# EAGLE board mini (EAGLE 6.2)
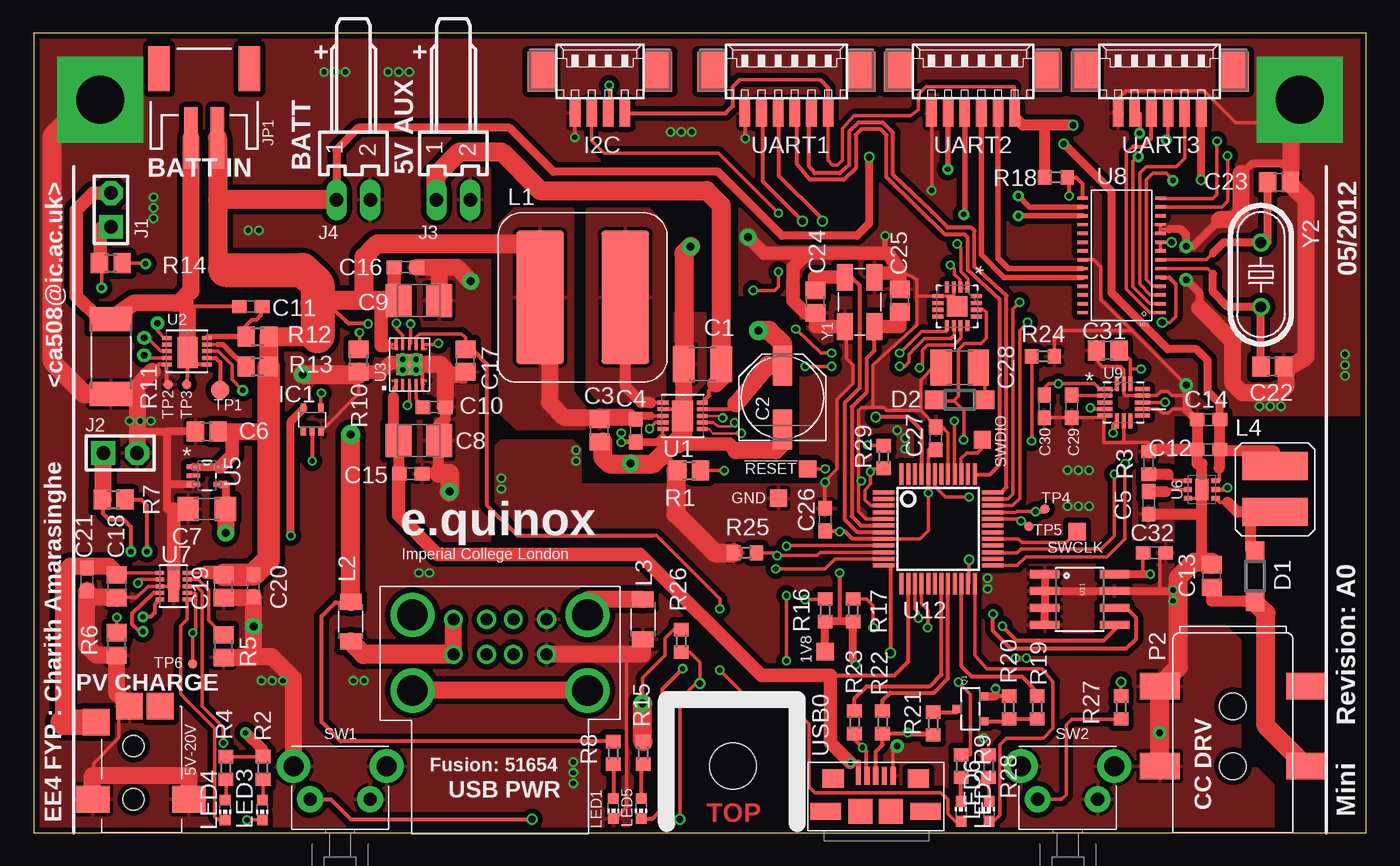
[diagram p0: board, top side]
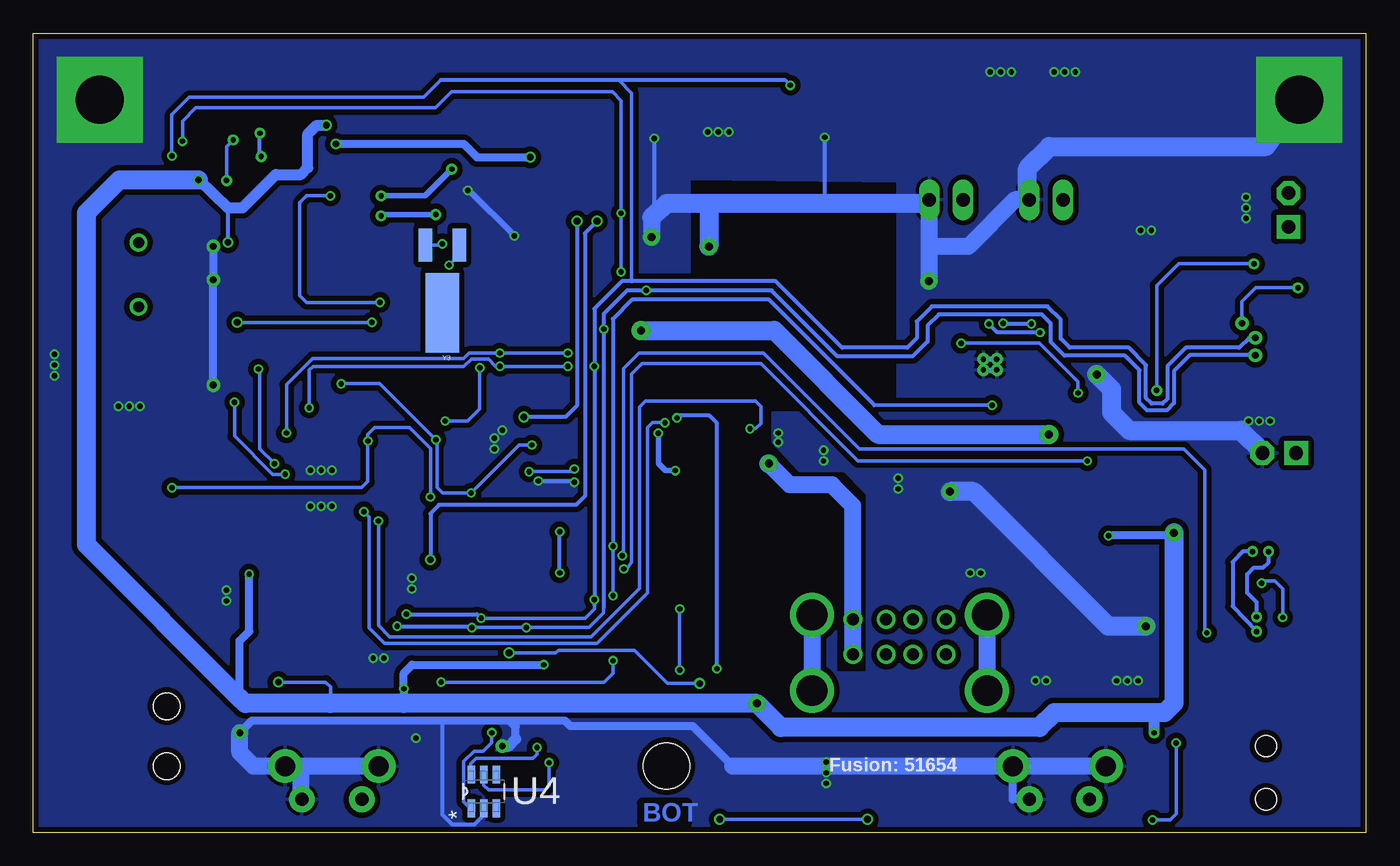
[diagram p1: board, bottom side, seen from below]

Size 100 x 60 mm. Coordinates in mm from the lower left corner, seen from the top.
Outline: 0,0 100,0 100,60 0,60 0,0
Copper layers (1*16): Top 0.035mm / dielectric 1.5mm / Bottom 0.035mm
Design rules: minimum track width 6mil, minimum drill 12mil, track to track 6mil, track to pad 6mil, pad to pad 6mil, via to via 6mil, smd to smd 0mil, copper to edge 10mil, drill to drill 10mil, minimum pad ring 10mil, minimum via ring 6mil, stop-mask expansion 2mil, vias tented up to drill 100mil, thermal gap 10mil
Holes 3.5 mm at 52.5,5

## Footprints (pad centres in the part's own frame; a part is rotated, then mirrored left to right if it is on the bottom)
TP13SQ = smd 1.3 x 1.3: TP 0,0
C1210 = smd 1.6 x 2.7: 1 -1.4,0; 2 1.4,0
PANASONIC_D = smd 3 x 1.4: + 2.4,0; - -2.4,0
C0805 = smd 1.3 x 1.5: 1 -0.85,0; 2 0.85,0
C0603 = smd 1.1 x 1: 1 -0.85,0; 2 0.85,0
C1206 = smd 1.6 x 1.8: 1 -1.4,0; 2 1.4,0
B/3528-21R = smd 1.95 x 2.5: + 1.525,0; - -1.525,0
C3225 = smd 1.6 x 2.7: 1 -1.4,0; 2 1.4,0
SOD123 = smd 1.4 x 1.4: A 1.9,0; C -1.9,0
53261-04 = smd 0.8 x 2: 1 1.875,-2.5; 2 0.625,-2.5; 3 -0.625,-2.5; 4 -1.875,-2.5 | smd 2.1 x 3: S1 4.375,0.625; S2 -4.375,0.625
SC70-5 = smd 0.4 x 0.7: 1 -0.65,-0.85; 2 0,-0.85; 3 0.65,-0.85; 4 0.65,0.85; 5 -0.65,0.85
SIP-100-02-40 = drill 1.016 pad 1.778 square: 1 -1.27,0 | drill 1.016 pad 1.778 octagon: 2 1.27,0
7395-02 = drill 1.016 long: 1 1.27,0; 2 -1.27,0
JST-2-SMD = smd 1 x 4.6: 1 -1,-3.7; 2 1,-3.7 | smd 1.6 x 3.4: NC1 -3.4,1.5; NC2 3.4,1.5
SDR1006 = smd 10.008 x 3.607: P$1 0,3.2; P$2 0,-3.2
L3216C = smd 1.2 x 1.6: 1 -1.5,0; 2 1.5,0
VLCF-SERIES = smd 4.9 x 2.1: 1 0,-1.7; 2 0,1.75
CHIP-LED0603 = smd 0.8 x 0.8: A 0,-0.75; C 0,0.75
FC68145S = smd 2 x 2: 1 0.3,-3; 2 -2,-3; 3 2.8,-1.8 | smd 2.5 x 2: 4A -4.15,4; 4B 3.05,4 | hole 1.6: 0,0; 0,4
FC6814XS = smd 3 x 2: 1A -5.5,-4.5; 1B -5.5,1.5; 2 5.5,1.5; 3 5.5,-4.5 | hole 2: 0,0; 0,-4.5
SOT23-R = smd 0.6 x 0.7: 1 -0.95,-1; 2 0.95,-1; 3 0,1
R0805 = smd 1.3 x 1.5: 1 -0.85,0; 2 0.85,0
R0603 = smd 1 x 1.1: 1 -0.85,0; 2 0.85,0
R2512 = smd 1.8 x 3.2: 1 -2.8,0; 2 2.8,0
B3F-315X = drill 1 pad 1.93: 1 -2.25,0; 2 2.25,0 | drill 1.5 pad 2.54: 3 -3.5,2.5; 4 3.5,2.5
TP14R = smd 1.4 x 1.4: TP 0,0
TP07R = smd 0.7 x 0.7: TP 0,0
SON50P300X300X100-11N = smd 0.813 x 0.305: 1 -1.473,0.991; 2 -1.473,0.508; 3 -1.473,0; 4 -1.473,-0.508; 5 -1.473,-0.991; 6 1.473,-0.991; 7 1.473,-0.508; 8 1.473,0; 9 1.473,0.508; 10 1.473,0.991 | smd 1.549 x 2.311: 11 0,0
DFN300X300X80-11N = smd 0.711 x 0.305: 1 -1.499,0.991; 2 -1.499,0.508; 3 -1.499,0; 4 -1.499,-0.508; 5 -1.499,-0.991; 6 1.499,-0.991; 7 1.499,-0.508; 8 1.499,0; 9 1.499,0.508; 10 1.499,0.991 | smd 1.499 x 2.311: 11 0.051,-0.102
INTERSIL_DFN_3X3 = smd 0.23 x 0.8: P1 -1,-1.5; P2 -0.5,-1.5; P3 0,-1.5; P4 0.5,-1.5; P5 1,-1.5; P6 1,1.5; P7 0.5,1.5; P8 0,1.5; P9 -0.5,1.5; P10 -1,1.5 | drill 0.4 pad 0.813: P$1 0.5,0.4; P$2 -0.5,0.4; P$3 -0.5,-0.4; P$4 0.5,-0.4 | smd 2 x 1.6: PAD 0,0
SOT95P275X110-6N = smd 1.321 x 0.559: 1 -1.27,0.94; 2 -1.27,0; 3 -1.27,-0.94; 4 1.27,-0.94; 5 1.27,0; 6 1.27,0.94
SOT65P210X110-5N = smd 1.016 x 0.356: 1 -1.016,0.66; 2 -1.016,0; 3 -1.016,-0.66; 4 1.016,-0.66; 5 1.016,0.66
SON65P210X210X80-7N = smd 0.61 x 0.356: 1 -1.041,0.66; 2 -1.041,0; 3 -1.041,-0.66; 4 1.041,-0.66; 5 1.041,0; 6 1.041,0.66 | smd 0.991 x 1.6: 7 0,0
SON50P200X300X80-11N = smd 0.66 x 0.305: 1 -1.016,0.991; 2 -1.016,0.508; 3 -1.016,0; 4 -1.016,-0.508; 5 -1.016,-0.991; 6 1.016,-0.991; 7 1.016,-0.508; 8 1.016,0; 9 1.016,0.508; 10 1.016,0.991 | smd 0.838 x 2.388: 11 0,0
QFN50P300X300X100-17N = smd 0.813 x 0.305: 1 -1.448,0.762; 2 -1.448,0.254; 3 -1.448,-0.254; 4 -1.448,-0.762; 9 1.448,-0.762; 10 1.448,-0.254; 11 1.448,0.254; 12 1.448,0.762 | smd 0.305 x 0.813: 5 -0.762,-1.448; 6 -0.254,-1.448; 7 0.254,-1.448; 8 0.762,-1.448; 13 0.762,1.448; 14 0.254,1.448; 15 -0.254,1.448; 16 -0.762,1.448 | smd 1.549 x 1.549: 17 0,0
QFN50P300X300X100-16N = smd 1.118 x 0.305: 1 -1.397,0.991; 2 -1.397,0.508; 3 -1.397,0; 4 -1.397,-0.508; 5 -1.397,-0.991; 9 1.397,-0.991; 10 1.397,-0.508; 11 1.397,0; 12 1.397,0.508; 13 1.397,0.991 | smd 0.305 x 1.118: 6 -0.508,-1.397; 7 0,-1.397; 8 0.508,-1.397; 14 0.508,1.397; 15 0,1.397; 16 -0.508,1.397
TSSOP28 = smd 0.8 x 0.25: 1 -2.921,4.623; 2 -2.921,3.962; 3 -2.921,3.302; 4 -2.921,2.642; 5 -2.921,1.981; 6 -2.921,1.321; 7 -2.921,0.66; 8 -2.927,0; 9 -2.921,-0.66; 10 -2.921,-1.321; 11 -2.921,-1.981; 12 -2.921,-2.642; 13 -2.921,-3.302; 14 -2.921,-3.962; 15 2.921,-3.962; 16 2.921,-3.302; 17 2.921,-2.642; 18 2.921,-1.981; 19 2.921,-1.321; 20 2.921,-0.66; 21 2.927,0; 22 2.921,0.66; 23 2.921,1.321; 24 2.921,1.981; 25 2.921,2.642; 26 2.921,3.302; 27 2.921,3.962; 28 2.921,4.623
SO08 = smd 0.61 x 2.21: 1 -1.905,-2.616; 2 -0.635,-2.616; 3 0.635,-2.616; 4 1.905,-2.616; 5 1.905,2.616; 6 0.635,2.616; 7 -0.635,2.616; 8 -1.905,2.616
LQFP48 = smd 0.3 x 1.6: 1 -2.75,-4.1; 2 -2.25,-4.1; 3 -1.75,-4.1; 4 -1.25,-4.1; 5 -0.75,-4.1; 6 -0.25,-4.1; 7 0.25,-4.1; 8 0.75,-4.1; 9 1.25,-4.1; 10 1.75,-4.1; 11 2.25,-4.1; 12 2.75,-4.1; 25 2.75,4.1; 26 2.25,4.1; 27 1.75,4.1; 28 1.25,4.1; 29 0.75,4.1; 30 0.25,4.1; 31 -0.25,4.1; 32 -0.75,4.1; 33 -1.25,4.1; 34 -1.75,4.1; 35 -2.25,4.1; 36 -2.75,4.1 | smd 1.6 x 0.3: 13 4.1,-2.75; 14 4.1,-2.25; 15 4.1,-1.75; 16 4.1,-1.25; 17 4.1,-0.75; 18 4.1,-0.25; 19 4.1,0.25; 20 4.1,0.75; 21 4.1,1.25; 22 4.1,1.75; 23 4.1,2.25; 24 4.1,2.75; 37 -4.1,2.75; 38 -4.1,2.25; 39 -4.1,1.75; 40 -4.1,1.25; 41 -4.1,0.75; 42 -4.1,0.25; 43 -4.1,-0.25; 44 -4.1,-0.75; 45 -4.1,-1.25; 46 -4.1,-1.75; 47 -4.1,-2.25; 48 -4.1,-2.75
53261-06 = smd 0.8 x 2: 1 3.125,-2.5; 2 1.875,-2.5; 3 0.625,-2.5; 4 -0.625,-2.5; 5 -1.875,-2.5; 6 -3.125,-2.5 | smd 2.1 x 3: S1 5.625,0.625; S2 -5.625,0.625
TE-MICROUSB-AB = smd 1.8 x 1.9: 1 -1.15,0; 2 1.15,0 | smd 2.3 x 1.3: 3 -3.75,0; 4 3.75,0 | smd 1.6 x 1.4: 10 -3.2,2.45; 11 3.2,2.45 | smd 0.4 x 1.35: P1 -1.3,2.675; P2 -0.65,2.675; P3 0,2.675; P4 0.65,2.675; P5 1.3,2.675
MC32594 = drill 2.3: P$1 -6.57,0.35; P$2 6.57,0.35; P$3 -6.57,-5.33; P$4 6.57,-5.33 | drill 0.9: USB1-1 -3.5,0; USB1-2 -1,0; USB1-3 1,0; USB1-4 3.5,0; USB2-1 -3.5,-2.62; USB2-2 -1,-2.62; USB2-3 1,-2.62; USB2-4 3.5,-2.62
TXC-7B = smd 2 x 1.2: 1 -1.85,-1.1; 2 1.85,-1.1; 3 1.85,1.1; 4 -1.85,1.1
HC49U-V = drill 0.813: 1 -2.413,0; 2 2.413,0
CRYSTAL-32KHZ-SMD = smd 2.5 x 6: SHEILD 0,5.08 | smd 1 x 2.5: X1 -1.27,0; X2 1.27,0

## Placement (x,y rotation side)
1V8  TPSTP13SQ  [TP13SQ]  59.4,13.6 0 top
!RESET!  TPSTP13SQ  [TP13SQ]  58.1,27.3 0 top
C1  22uF  [C1210]  50.2,35.18 180 top
C2  150uF  [PANASONIC_D]  56.2,32.68 90 top
C3  10uF  [C0805]  42.45,30.18 90 top
C4  0.1uF  [C0603]  45.2,30.18 270 top
C5  220nF  [C0603]  83.66,24.76 270 top
C6  100nF  [C0805]  13,30.1 180 top
C7  1uF  [C1206]  13,24.3 180 top
C8  10uF  [B/3528-21R]  28.9,29.44 180 top
C9  10uF  [B/3528-21R]  28.9,39.94 180 top
C10  1n  [C0603]  30.05,31.94 0 top
C11  10n  [C0603]  16.3,39.49 180 top
C12  1uF  [C0603]  88.16,28.76 180 top
C13  1uF  [C0805]  88.41,19.26 90 top
C14  0.1uF  [C0603]  88.16,31.01 180 top
C15  100n  [C0603]  28.3,26.94 0 top
C16  100n  [C0603]  27.9,42.44 0 top
C17  1uF  [C0805]  32.4,35.44 270 top
C18  1uF  [C0805]  6.25,18.5 270 top
C19  1uF  [C0805]  14.25,18.5 270 top
C20  100n  [C0603]  16.5,18.52 270 top
C21  100n  [C0603]  4,19 270 top
C22  [C0805]  92.96,34.98 180 top
C23  [C0805]  93.46,48.82 180 top
C24  [C0805]  58.66,39.86 90 top
C25  [C0805]  65,39.94 270 top
C26  100n  [C0603]  59.4,23.5 90 top
C27  100n  [C0603]  67.7,29.6 90 top
C28  0.015F  [C3225]  69.5,34.9 180 top
C29  0.1uF  [C0603]  77.9,32 270 top
C30  0.1uF  [C0603]  75.85,32 270 top
C31  4.7uF  [C0805]  80.6,36.2 180 top
C32  0.1uF  [C0603]  84.1,21 0 top
D1  MBR0540T1  [SOD123]  91.66,19.26 90 top
D2  [SOD123]  69.5,32.5 180 top
GND  TPSTP13SQ  [TP13SQ]  55.9,25.1 0 top
I2C  53261-04  [53261-04]  42.5,56.5 0 top
IC1  74LVC1G06DCK  [SC70-5]  20.9,31 0 top
J1  F-1X02-SIP-100-40  [SIP-100-02-40]  5.8,46.74 90 top
J2  F-1X02-SIP-100-40  [SIP-100-02-40]  6.5,28.5 0 top
J3  22-05-7028-02  [7395-02]  31.5,47.5 180 top
J4  22-05-7028-02  [7395-02]  24,47.5 180 top
JP1  [JST-2-SMD]  12.8,55.84 0 top
L1  2.2uH  [SDR1006]  41.2,40.18 90 top
L2  30ohm  [L3216C]  23.8,15.84 90 top
L3  30ohm  [L3216C]  45.72,16 270 top
L4  22uH  [VLCF-SERIES]  93.16,25.76 0 top
LED1  USB_ON  [CHIP-LED0603]  43.5,1.8 180 top
LED2  USB_CHG_GD  [CHIP-LED0603]  69.6,1.6 0 top
LED3  CHG  [CHIP-LED0603]  17.16,1.7 180 top
LED4  PG  [CHIP-LED0603]  14.38,1.7 180 top
LED5  USB_FAULT  [CHIP-LED0603]  45.6,1.8 180 top
LED6  USRLED  [CHIP-LED0603]  71.7,1.6 0 top
P1  CLIFF_DCJACK1.3MM  [FC68145S]  7.5,6.5 180 top
P2  CLIFF_DCJACK2.1-2.5MM  [FC6814XS]  90,9.5 0 top
Q1  MMBT2907  [SOT23-R]  70.3,9.3 90 top
R1  28.7k  [R0805]  49.2,27.18 0 top
R2  100  [R0603]  17.22,4.86 90 top
R3  2.7  [R0603]  83.66,27.76 270 top
R4  100  [R0603]  14.44,4.86 90 top
R5  RDPM  [R0805]  14.25,14 90 top
R6  800  [R0805]  6.25,14.16 90 top
R7  RVTSB  [R0805]  6,25 0 top
R8  1K  [R0603]  43.5,6 90 top
R9  200  [R0603]  69.6,5 270 top
R10  80k  [R0805]  24.4,35.44 90 top
R11  0.015  [R2512]  5.8,35.74 270 top
R12  150  [R0805]  16.8,37.24 0 top
R13  1K  [R0805]  16.8,34.99 0 top
R14  10K  [R0805]  5.8,42.74 0 top
R15  100  [R0603]  45.75,6 90 top
R16  2.7k  [R0603]  59.4,16.7 270 top
R17  2.7k  [R0603]  61.5,16.7 270 top
R18  1.5k  [R0603]  76.72,49.18 180 top
R19  2K  [R0603]  75.3,9.4 270 top
R20  10K  [R0603]  73.2,9.4 90 top
R21  1.5K  [R0603]  67.5,8.2 90 top
R22  33  [R0603]  63.7,8.3 90 top
R23  33  [R0603]  61.6,8.3 90 top
R24  2.7k  [R0603]  75.75,35.75 180 top
R25  10K  [R0603]  53.4,21 0 top
R26  2.7k  [R0603]  48.6,14.4 90 top
R27  2.7k  [R0603]  81.6,9.4 90 top
R28  500  [R0603]  71.65,5 270 top
R29  2.7k  [R0603]  63.8,28.2 90 top
SW1  B3F-3152  [B3F-315X]  23,2.5 0 top
SW2  B3F-3152  [B3F-315X]  77.6,2.5 0 top
SWCLK  TPSTP13SQ  [TP13SQ]  78.3,22.6 0 top
SWDIO  TPSTP13SQ  [TP13SQ]  71.2,29.5 0 top
TP1  TPTP14R  [TP14R]  14,33.24 0 top
TP2  TPTP07R  [TP07R]  10.1,33.64 0 top
TP3  TPTP07R  [TP07R]  11.5,33.64 270 top
TP4  TPTP07R  [TP07R]  75.9,24.3 0 top
TP5  TPTP07R  [TP07R]  74.7,23 0 top
TP6  TPTP07R  [TP07R]  11.92,12.66 0 top
U1  TPS2500  [SON50P300X300X100-11N]  48.7,31.28 0 top
U2  DS2786G+  [DFN300X300X80-11N]  11.5,36.14 0 top
U3  ISL9203  [INTERSIL_DFN_3X3]  28.2,35.14 0 top
U4  IP4220CZ6  [SOT95P275X110-6N]  66.2,3.1 90 bottom
U5  NCP4588DSQ25T1G  [SOT65P210X110-5N]  13,26.8 0 top
U6  TPS61160ADRVT  [SON65P210X210X80-7N]  87.66,25.76 0 top
U7  BQ24210DQCT  [SON50P200X300X80-11N]  10.5,18.5 0 top
U8  M41T62Q6F  [QFN50P300X300X100-17N]  69.3,39.5 270 top
U9  MMA8453Q  [QFN50P300X300X100-16N]  81.8,32.3 0 top
U10  SC16IS752  [TSSOP28]  81.64,43.66 180 top
U11  EEPROM-I2CSMD  [SO08]  78.5,17.5 270 top
U12  LPC11U24FBD48/401  [LQFP48]  67.88,22.8 270 top
UART1  53261-06  [53261-06]  56.5,56.5 0 top
UART2  53261-06  [53261-06]  70.5,56.5 0 top
UART3  53261-06  [53261-06]  84.5,56.5 0 top
USB0  TE1981584-1  [TE-MICROUSB-AB]  63.2,1.6 0 top
USB2  MULTICOMP-MC32594  [MC32594]  35,16 0 top
Y1  TXC-7B  [TXC-7B]  62,39.84 90 top
Y2  1.8432M  [HC49U-V]  92.1,41.88 270 top
Y3  32.768kHz  [CRYSTAL-32KHZ-SMD]  69.3,44.1 180 bottom

## Library data of the parts
1V8 !RESET! GND SWCLK SWDIO TP1-TP6 = testpad
C1 = resistor; FARNELL: 1907362
C2 = resistor; FARNELL: 1850096
C3 = resistor; FARNELL: 1833812
C4-C7 C10 C11 C14-C17 C20-C32 R2 R4-R10 R12-R29 = resistor
C8 C9 = resistor; FARNELL: CA06845
C12 = resistor; FARNELL: 1828798
C13 C18 = resistor; FARNELL: 1735541
C19 = resistor; FARNELL: 1833845
D1 = diode; FARNELL: 9556923
D2 = diode
I2C = con-molex; OC_FARNELL: 1125374; OC_NEWARK: unknown
IC1 = 74xx-little-de
J1 J2 = con-headers-jp
J3 J4 = con-molex; OC_FARNELL: 9731601; OC_NEWARK: unknown
JP1 = SparkFun-Connectors
L1 = farnellparts; FARNELL: 1828074
L2 L3 = resistor; FARNELL: FT01179
L4 = minibox-parts; FARNELL: 1670099
LED1-LED6 = led
P1 P2 SW1 SW2 U12 Y1 = minibox-parts
Q1 = microbuilder
R1 = resistor; FARNELL: 1160233
R3 = resistor; FARNELL: 1717778
R11 = resistor; FARNELL: 1107396
U1 = minibox-parts; MPN: TPS2500DRCT; OC_FARNELL: 1774589; OC_NEWARK: 29R0268; PACKAGE: SON-10; SUPPLIER: Texas Instruments
U2 = minibox-parts; DESCRIPTION: Stand-Alone OCV-Based Fuel Gauge; MPN: DS2786G+; OC_FARNELL: -; OC_NEWARK: 50M0907; PACKAGE: DFN-10; SUPPLIER: Maxim
U3 = minibox-parts; FARNELL: 1361031
U4 = minibox-parts; MPN: IP4220CZ6; OC_FARNELL: 1506629; OC_NEWARK: 61M6815; PACKAGE: SSOT-6; SUPPLIER: NXP
U5 = minibox-parts; MPN: NCP4588DSQ25T1G; OC_FARNELL: 1885132; OC_NEWARK: 41T0737; PACKAGE: SC70-5; SUPPLIER: ON SEMICONDUCTOR
U6 = EE4_EQNXMPPT_PARTS; MPN: TPS61160ADRVT; OC_FARNELL: 1735594; OC_NEWARK: 1735594; PACKAGE: SON-6; SUPPLIER: Texas Instruments
U7 = minibox-parts; MPN: BQ24210DQCT; OC_FARNELL: 1903633; OC_NEWARK: 56T0491; PACKAGE: SON-10; SUPPLIER: TEXAS INSTRUMENTS
U8 = minibox-parts; MPN: M41T62Q6F; OC_FARNELL: 1224441; OC_NEWARK: 56P9316; PACKAGE: QFN-16; SUPPLIER: STMICROELECTRONICS
U9 U10 = farnellparts
U11 = SparkFun-DigitalIC
UART1-UART3 = con-molex; OC_FARNELL: 1125375; OC_NEWARK: unknown
USB0 USB2 = connectors-bbng
Y2 = SparkFun-FreqCtrl; FARNELL: 1611755
Y3 = SparkFun-FreqCtrl

## Nets
1.8V: 1V8.TP C7.1 C26.1 C27.1 C30.1 C32.1 D2.A I2C.1 IC1.5 Q1.2 R2.2 R4.2 R15.2 R16.2 R17.2 R18.2 R20.2 R26.2 R27.2 R29.2 U5.4 U8.14 U9.1 U10.8 U10.9 U11.8 U12.8 U12.44 UART1.1 UART2.1 UART3.1
!CHRG_ST!: R9.1 U3.P3 U12.9
!EN_PVCHG!: R25.2 TP6.TP U7.7 U12.10
!EXT_UART_RST!: U10.5 U12.34
!USB_CHG_EN!: IC1.2 U12.11
+5V: C8.+ C15.1 U3.P1 U4.5 U12.14 USB0.P1
+5V/1: C2.+ L2.2 R8.2 U1.9
+5V/2: C1.1 J3.1 U1.10
+12V: C13.1 D1.C P2.3
+18V: C18.1 C21.1 P1.3 U7.1
AXM_INT: U9.11 U12.27
AXM_ON: C31.1 U9.14 U12.25
CHRG_EN: IC1.4 U3.P6
EN_5V: TP5.TP U1.4 U12.32
EN_USB: TP4.TP U1.7 U12.33
EXT_UART_IRQ: R18.1 U10.15 U12.35
FG_AIN0: J1.1 R14.1 U2.1
FG_VOUT: R14.2 U2.8
GND: C1.2 C2.- C3.1 C4.2 C5.2 C6.2 C7.2 C8.- C9.- C10.2 C12.2 C13.2 C14.2 C15.2 C16.2 C17.2 C18.2 C19.2 C20.2 C21.2 C22.1 C23.1 C24.1 C25.1 C26.2 C27.2 C28.2 C29.2 C30.2 C31.2 C32.2 GND.TP I2C.4 IC1.3 J2.2 J3.2 J4.2 L3.2 LED1.C P1.1 P1.4A P1.4B P2.1A P2.1B R1.1 R3.1 R5.1 R6.1 R10.1 R11.2 R24.1 R25.1 R28.1 SW1.2 SW1.3 SW1.4 SW2.2 SW2.3 SW2.4 TP2.TP U1.2 U1.5 U1.11 U2.5 U3.P5 U3.P$1 U3.P$2 U3.P$3 U3.P$4 U3.PAD U4.2 U5.3 U6.3 U6.7 U7.3 U7.11 U8.3 U8.5 U8.17 U9.5 U9.7 U9.10 U9.12 U9.15 U10.10 U10.11 U10.22 U11.1 U11.2 U11.3 U11.4 U11.7 U12.5 U12.41 UART1.6 UART2.6 UART3.6 USB0.P5 USB2.USB1-4 USB2.USB2-4 Y1.2 Y1.4
GNDA: C11.2 J1.2 JP1.1 R11.1 TP3.TP U2.6 U2.11
LED_DIM: R24.2 U6.5 U12.43
MCU_USB_DN: R23.2 U12.19
MCU_USB_DP: R22.2 U12.20
N$1: L1.P$2 U1.1
N$2: C11.1 R12.1 U2.10
N$3: R10.2 U3.P8
N$4: L2.1 USB2.USB1-1 USB2.USB2-1
N$5: C10.1 U3.P4
N$6: L3.1 USB2.P$1 USB2.P$2 USB2.P$3 USB2.P$4
N$7: LED1.A R8.1
N$8: R13.1 U2.9
N$9: LED2.C R9.2
N$10: R1.2 U1.6
N$11: D1.A L4.1 U6.4
N$12: C17.1 LED2.A U3.P7
N$13: C5.1 U6.2
N$14: R3.2 U6.1
N$15: R7.2 U7.4
N$16: C28.1 D2.C
N$17: R5.2 U7.9
N$18: R6.2 U7.2
N$19: LED5.A R15.1
N$20: P2.2
N$21: LED4.A R4.1
N$22: LED3.A R2.1
N$23: P1.2
N$24: Q1.1 R19.2 R20.1
N$25: C22.2 U10.6 Y2.2
N$26: R27.1 SW2.1
N$27: C24.2 U12.7 Y1.3
N$28: C25.2 U12.6 Y1.1
N$29: LED6.C R28.2
N$30: U10.3 UART3.2
N$31: C23.2 U10.7 Y2.1
N$32: U10.4 UART3.3
N$33: U10.23 UART2.2
N$34: U10.24 UART2.3
N$35: U10.17 UART2.4
N$36: U10.16 UART2.5
N$37: U10.2 UART3.5
N$38: U10.1 UART3.4
N$39: U12.36 UART1.2
N$40: U12.37 UART1.3
N$41: U12.45 UART1.4
N$42: U12.23 UART1.5
N$43: U12.4
N$44: U8.2 Y3.X1
N$45: Q1.3 R21.2
N$46: U8.1 Y3.X2
N$48: !RESET!.TP R29.1 U12.3
N$52: C29.1 U9.2
PV_CHG: LED3.C U7.8
PV_PG: LED4.C U7.6
PVCHG_TS: J2.1 R7.1 U7.5
RTC_ALARM: U8.11 U12.40
SCL: I2C.2 R16.1 U2.3 U8.10 U9.4 U10.13 U11.6 U12.15
SDA: I2C.3 R17.1 U2.4 U8.9 U9.6 U10.14 U11.5 U12.16
SW1: R26.1 SW1.1 U12.12
SWCLK: SWCLK.TP U12.29
SWDIO: SWDIO.TP U12.39
USB_CONNECT: R19.1 U12.22
USB_DM: R23.1 U4.6 USB0.P2
USB_DP: R21.1 R22.1 U4.1 USB0.P3
USB_FAULT: LED5.C U1.8
USRLED: LED6.A U12.24
VBAT: C3.2 C4.1 C6.1 C9.+ C12.1 C14.1 C16.1 C19.1 C20.1 J4.1 JP1.2 L1.P$1 L4.2 R12.2 R13.2 U1.3 U3.P9 U3.P10 U5.1 U5.5 U6.6 U7.10
VPROG: TP1.TP U2.7

## Tracks (layer width: path | path; a pad name or v marks a point on that pad's centre or on a via)
1.8V  (via drill 0.4, 0.4 pad 0.41, 0.4 pad 0.61, 0.4 pad 0.81, 0.5 pad 0.3, 0.5 pad 0.41, 0.6 pad 1.27)
  Top 0.254: R4.2 R2.2 | U10.8 U10.9 85.4,44.32 v85.4,44.3 | R26.2 48.07,15.25 47.4,14.58 47.4,13.31 45.7,11.61 v45.7,9.7 | R27.2 v81.6,11.3 | U12.8 66.5,22.05 67.13,22.68 U12.44 | UART1.1 59.6,54 59.6,50.46 59.96,50.1 60.34,50.1 60.7,50.46 60.7,52.84 61.56,53.8 65.82,53.8 66.4,54.28 66.4,55.43 66.97,56 73.6,56 73.6,54 UART2.1 | 53,56.5 59.03,56.5 | C27.1 67.13,28.75 U12.44 | U8.14 71.24,39.25 71.5,39.09 71.5,37.11 71.09,36.7 69.85,36.7 69.4,36.25 69.4,32.76 69.04,32.4 | 69.04,32.4 67.6,32.4 D2.A | 69.04,32.4 69.1,32.4 69.8,31.7 v69.8,29.5 | U12.44 67.15,26.9 v67.15,25.5 | U9.1 80,33.29 79.59,33.7 v76.9,33.7 76.2,33.7 75.88,33.4 C30.1 | v83.8,19.4 83.25,19.4 C32.1 | R29.2 62.6,29.05 v62.6,29.1
  Top 0.305: R20.2 Q1.2 | R17.2 60.5,15.85 v60.5,19.5 | U12.8 61.45,22.05 60.9,22.6 v60.5,22.6 60.5,22.65 C26.1 | I2C.1 51.93,54 52.5,54.57 52.5,56 53,56.5 | 59.03,56.5 59.62,55.9 UART1.1
  Top 0.61: U5.4 14.4,26.14 C7.1 | R2.2 17.1,5.71 17.1,6.3 | v19.3,22.3 19.3,30.88 20.22,31.8 20.25,31.8 IC1.5 | Q1.2 72.2,10.25 v72.2,10.8 | v61.7,12.6 61.5,12.9 R17.2 R16.2 1V8.TP | UART3.1 87.6,54 v87.6,49 | v83.8,19.4 U11.8
  Top 0.813: v15.9,7.5 15.93,7.5 17.22,6.21 R2.2 | v78,53.1 75.9,53.1 | 75.9,53.1 74.25,53.1 73.62,53.72 UART2.1 | R18.2 75.9,49.18 75.9,53.1
  Top 1.27: C7.1 v14.4,22.5
  Top 1.422: R15.2 45.7,6.85 v45.7,9.7
  Bottom 0.254: v81.6,11.3 78.06,11.3 77.7,10.94 77.7,9.7 | 77,33.7 v76.9,33.7 74,33.7 v69.8,29.5 69.7,29.4 69.7,25.9 69.3,25.5 v67.15,25.5 63.55,29.1 v62.6,29.1
  Bottom 0.305: v60.5,19.5 v60.5,22.6 | 85.4,46.9 v85.4,44.3
  Bottom 0.61: 14.4,22.3 v19.3,22.3 | 72.2,9.7 v72.2,10.8 72.2,11.97 71.58,12.6 v61.7,12.6 | 84.5,10.1 84.52,14.4 83.8,15.12 v83.8,19.4
  Bottom 0.813: 15.9,9.01 v15.9,7.5 | v87.6,49 85.4,46.9 84.3,46.9 81.8,49.4 79.91,49.4 79.4,49.91 79.4,52.43 78.73,53.1 v78,53.1
  Bottom 1.422: v14.4,22.5 14.4,22.3 14.4,9.73 15.12,9.01 15.9,9.01 23.39,9.01 24.5,7.9 43.9,7.9 v45.7,9.7 72.2,9.7 77.7,9.7 84.1,9.7 84.5,10.1 96,21.6 96,46.53 93.53,49 v87.6,49
!CHRG_ST!  (via drill 0.4 pad 0.41, 0.4 pad 0.61)
  Top 0.254: U3.P3 28.2,32.24 v28.05,32.09 | U12.9 56.5,21.55 v56.5,21.5 | R9.1 70.3,5.85 70.3,10.4 v69.4,11.3 | v56.5,17.8 v56.5,12.9
  Bottom 0.254: v28.05,32.09 36.89,32.09 | v69.4,11.3 57.17,11.3 56.5,11.97 v56.5,12.9 | v56.5,21.5 v56.5,17.8
  Bottom 0.305: 36.89,32.09 44.8,40 55.07,40 56.5,38.57 v56.5,21.5
!EN_PVCHG!  (via drill 0.4 pad 0.61)
  Top 0.254: U7.7 12.09,17.99 12.16,17.92 12.16,15.2 12.14,15.2 v11.94,15 11.94,13.96 TP6.TP | U12.10 59.05,21.05 58.8,20.8 v55.8,20.8 55.6,21 R25.2
  Bottom 0.254: v11.94,15 12.1,15 12.1,27.24 13.66,28.8 38,28.8 45.2,36 54.53,36 55.7,34.83 55.7,21 v55.8,20.8
!EXT_UART_RST!  (via drill 0.4 pad 0.61, 0.5 pad 0.3)
  Top 0.254: 85.7,41.19 85.7,38.72 85.28,38.3 v84.7,38.3 | U12.34 73.47,24.55 74,25.08 74,37.7 v74.6,38.3
  Top 0.305: U10.5 85.21,41.68 85.7,41.19
  Bottom 0.254: v74.6,38.3 v84.7,38.3
!USB_CHG_EN!  (via drill 0.4 pad 0.61)
  Top 0.254: v55.7,19.8 59.4,19.8 60.15,20.55 U12.11
  Top 0.305: IC1.2 v20.9,27.9
  Bottom 0.254: v20.9,27.9 38.1,27.9 45.4,35.2 54.32,35.2 55.1,34.42 55.1,20.3 55.5,19.8 v55.7,19.8
+5V  (via drill 0.4 pad 0.41)
  Top 0.254: U3.P1 27,33.36 26.98,32.69 | 61.9,4.5 USB0.P1 61.88,5.28 v61.3,5.25
  Top 0.305: 59.8,11.8 64.58,11.8 65.63,12.85 U12.14
  Top 0.406: 61.9,4.5 61.9,5.3 61.26,5.3
  Top 0.813: 26.98,32.69 26.98,29.84 C8.+ 27.38,27.27 C15.1
  Top 1.016: 61.26,5.3 59.8,6.76 59.8,11.8 54.62,11.8 45.52,20.9 30.32,20.9 27.38,23.84 27.38,27.27
  Bottom 0.254: U4.5 66.2,3.56 65.84,3.2 61.62,3.2 61.3,3.52 v61.3,5.25
+5V/1  (via drill 0.6 pad 1.42)
  Top 0.305: U1.9 52.2,31.79 52.7,32.18 | R8.2 23.05,6.85 21.6,8.3 21.6,16.24 22.66,17.3 23.8,17.3 L2.2
  Top 1.27: 55.1,35.08 52.7,32.18
  Top 1.422: L2.2 v23.8,29.9 | 55.1,35.08 C2.+ 56.2,36.7 55.2,37.7 v54.4,37.7
  Bottom 1.422: v54.4,37.7 44.4,37.7 36.6,29.9 v23.8,29.9
+5V/2
  Top 0.305: U1.10 50.7,32.8 50.7,33.18 51.2,33.68
  Top 1.27: C1.1 51.7,35.18 51.7,34.18 51.2,33.68
  Top 1.422: J3.1 30.2,47.5 30.2,49.31 31.98,51.1 35.1,51.1 38,48.2 50.5,48.2 51.6,47.1 C1.1
+12V
  Top 0.813: D1.C 88.41,17.36 C13.1
  Top 1.422: P2.3 92.48,8.02 92.48,16.46 91.66,17.28 D1.C
+18V
  Top 0.254: U7.1 6.25,19.49 C18.1
  Top 0.305: 2.75,20 4,20 C21.1
  Top 1.27: 2.24,8.3 2.24,19.49 2.75,20 5.66,20 6.24,19.42 C18.1
  Top 1.93: P1.3 2.24,8.3
AXM_INT  (via drill 0.4 pad 0.61)
  Top 0.254: U9.11 v84.9,32.3 | v81.1,26.9 81.1,22.28 80.12,21.3 74.1,21.3 73.8,21 71.98,21 U12.27
  Bottom 0.254: v84.9,32.3 84.9,29.76 82.04,26.9 v81.1,26.9
AXM_ON  (via drill 0.4 pad 0.61)
  Top 0.254: C31.1 82.31,35.5 U9.14 82.3,34.8 v83.1,34.8 | v81.9,27.7 81.9,22.06 80.54,20.7 74.45,20.7 73.8,20.05 U12.25
  Bottom 0.254: v83.1,34.8 83,34.8 83,28.8 v81.9,27.7
CHRG_EN  (via drill 0.4 pad 0.61)
  Top 0.254: U3.P6 30.28,36.64 v30.38,36.74 | v21.6,33 21.55,33 IC1.4
  Bottom 0.254: v30.38,36.74 24.48,36.74 21.6,33.85 v21.6,33
EN_5V  (via drill 0.4 pad 0.3, 0.4 pad 0.61)
  Top 0.254: U1.4 46.67,30.77 v46.22,30.32 | U12.32 74,23.55 v74.1,23.4
  Top 0.305: TP5.TP v74.1,23.4
  Bottom 0.254: v46.22,30.32 45.81,30.32 45.4,30.73 45.4,31.99 45.81,32.4 54.05,32.4 54.5,31.95 54.5,18.35 58.15,14.7 73.25,14.7 74.1,15.55 v74.1,23.4
EN_USB  (via drill 0.4 pad 0.3, 0.4 pad 0.61)
  Top 0.2: 51,30.78 51.4,30.48 52.3,30.48 v52.6,30.78
  Top 0.254: U1.7 50.95,30.77 51,30.78 | U12.33 73.68,24.05 73.8,24.1 v75.2,24.1
  Top 0.305: v75.2,24.1 75.9,24.1 TP4.TP
  Bottom 0.254: v52.6,30.78 53.52,30.78 53.9,30.4 53.9,18.01 57.71,14.2 73.63,14.2 74.8,15.37 74.8,23.7 v75.2,24.1
EXT_UART_IRQ  (via drill 0.4 pad 0.61)
  Top 0.254: U12.35 73.11,25.05 73.5,25.44 73.5,39.3 v74,39.8
  Top 0.305: 77.7,49.18 78.24,49.18 78.72,48.7 U10.15 | R18.1 77.7,49.18 | 77.7,49.18 v77.7,47.8
  Bottom 0.254: v77.7,47.8 79.49,47.8 80,47.29 80,40.3 79.5,39.8 v74,39.8
FG_AIN0  (via drill 0.4 pad 0.81, 0.5 pad 1.02)
  Top 0.254: U2.1 9.81,37.13 9.3,37.64 v9.3,38.24 | 5,42.74 5.1,42.74 v5.1,40.9
  Top 1.016: R14.1 5,42.74 5,45.34 5.8,45.34 J1.1
  Bottom 0.254: v5.1,40.9 8.27,40.9 9.3,39.87 v9.3,38.24
FG_VOUT  (via drill 0.4 pad 0.81)
  Top 0.254: U2.8 13.86,36.14 14.9,35.09 14.9,34 v15.7,33.2 | R14.2 8.4,42.74 v8.4,42.7
  Bottom 0.254: v8.4,42.7 14.05,42.7 15.7,41.05 v15.7,33.2
GND  (via drill 0.4, 0.4 pad 0.61, 0.5 pad 1.02, 0.6 pad 1.27, 3.6 pad 6.45)
  Top 0.254: U1.5 47.2,30.29 47.2,29.68 | C18.2 7.73,17.65 8.58,18.5 U7.3 U7.11 | U6.3 87.66,25.1 U6.7 | U10.10 U10.11 84.56,45.3 85.2,45.3 | 4.4,4.3 4.5,4.3 4.5,5.21 6.4,7.11 6.4,9.6 7.2,9.6 P1.1 | U12.5 62.46,23.55 61.9,24.11 61.9,26.4 | 61.9,26.4 61.9,31.68 62.12,31.9 63,31.9 | 66.3,40.26 66.3,38.1 63,35.1 63,31.9 | 66.3,40.26 66.3,41.5 65,42.2 | IC1.3 21.6,30.15 24.4,32.95 R10.1 | LED1.C 43.65,1.05 44.5,1.9 44.5,13.4 | USB0.P5 64.5,6.2 64.8,6.2 v64.8,6.5 | UART2.6 67.4,54 v67.4,48.2 | UART3.6 81.4,54 81.4,55.12 81.98,55.7 87.8,55.7 90.2,53.3 95,53.3 | 95.3,53.3 95,53.3 | 95,53.3 v95,55 | UART1.6 53.4,54 | U10.22 79.56,43 80.1,42.46 80.1,40 82.45,37.65 | 82.45,37.65 v86.5,33.6 | R24.1 76.6,37.07 77.23,37.7 82.45,37.7 82.45,37.65 | U12.41 68.6,26.9 68.6,30 68.13,30.48 67.73,30.48 | 67.73,30.48 66.57,31.7 | 66.57,31.7 64,31.7 63.8,31.9 63,31.9 | v62.1,26.4 61.9,26.4 | C27.2 68.03,30.45 67.73,30.48 | C28.2 67.48,34.9 66.57,33.99 66.57,31.7 | 66.3,40.26 U8.5 69.05,40.26 | 69.05,40.26 U8.3 | U8.17 69.3,39.6 69.05,39.6 69.05,40.26 | Y1.4 61,37.99 61,35.6 61.5,35.1 61.5,33.7 60.3,32.5 60.3,27.3 59.4,26.4 59.4,26.2 | C30.2 C29.2 80.4,31.15 U9.5 80.3,31.31 80.3,29.3 81.8,29.3 | U9.7 81.8,29.3 | 81.8,29.3 83.66,29.3 R3.1 | U9.10 84.4,31.79 84.69,31.5 85.15,31.5 85.45,31.8 86.5,31.79 86.5,31.71 | 86.5,32.8 86.5,32.81 85.4,32.81 85.11,33.1 84.6,33.1 84.3,32.8 U9.12 81.9,32.81 81.8,32.91 U9.15 81.8,34.78 81.58,35 80.15,35 79.75,35.5 C31.2 | C32.2 84.5,21 84.5,18.14 | C4.2 44.1,29.33 v44.1,29.3 | v44.1,29.3 44.2,29.3 44.2,29.4 45.2,29.4 C4.2 | v44.1,30 v44.1,29.3 | v44.1,29.3 45.2,29.3 C4.2
  Top 0.305: 8.9,34.64 9.4,35.15 U2.5 10,33.64 TP2.TP | U1.2 48.7,31.79 U1.11 | U3.P5 29.2,35.14 U3.PAD 28.7,35.14 U3.P$1 | U3.P$4 U3.P$1 | U3.P$1 U3.P$2 U3.P$3 27.7,35.3 | U3.P$1 28.7,34.66 27.66,34.66 | 53.4,54 v53.4,52.1 | I2C.4 40.6,54 v40.6,52.2 | C26.2 59.4,26.2 v59.4,26.3
  Top 0.406: J2.2 7.8,28.5 7.8,30.1 | 64.1,43.5 63.9,43.5 v63.9,44.8
  Top 0.61: 7.2,32.94 R11.2 | C4.2 46.85,29.33 47.2,29.68 47.2,28.88 | R1.1 47.91,27.68 47.2,28.39 47.2,28.88 | C3.1 42.7,29.33 | 47.76,28.88 47.2,28.88 | 94.28,34.98 94,34.98 C22.1 | C23.1 94.31,48.5 94.5,48.5 94.5,49.29 94.36,49.46 93.74,50.2 91.45,50.2 90.6,49.5 | 87.5,39.38 87.5,40.5 v86.5,41.5 | 89,46 87,44 v86.5,44 86.5,44.9 86.1,45.3 85.2,45.3 | C6.2 10,30.1 | 10,30.1 10,26.14 | 10,26.14 10,24.3 10.5,24.3 C7.2 | U5.3 10,26.14 | 7.8,30.1 10,30.1 | v86.5,33.6 86.5,32.8 86.5,31.71 87.31,30.9 C14.2 | U11.1 U11.2 | U11.2 U11.3 U11.4 | U11.2 U11.7 84.5,18.14 85.92,18.14 85.92,17.9
  Top 0.813: C15.2 29.15,26.98 30.38,26.98 30.38,29.44 C8.- 30.43,30.7 30.9,31.03 C10.2 30.9,31.99 | C13.2 87.66,20.11 87.66,23.91 | 87.66,23.91 U6.7 87.68,25.76 87.68,27.68 87.31,27.68 C12.2 | C12.2 83.66,28.76 R3.1 | C5.2 87.66,23.91 | C14.2 C12.2
  Top 1.016: 52.7,28.68 52.2,29.18 48.38,29.18 | 27.7,35.3 26.77,35.3 26.06,34.59 R10.1 | U7.11 10.5,24.3 | 65,42 63.1,42 Y1.2 | Y1.4 58.66,37.99 C24.1 57.92,39.01 57,39.93 57,42.42 58.08,43.5 | 58.08,43.5 64.1,43.5 65,42.2 65,42 | 65,42 C25.1 | v53.6,44.7 54.8,43.5 58.08,43.5
  Top 1.27: 8.9,34.64 7.2,32.94 7.77,32.94 J2.2 | C2.- 56.2,29.18 55.7,28.68 52.7,28.68 | 48.7,31.79 48.8,31.79 C1.2 | C10.2 30.9,34.34 | 30.9,34.34 30.9,34.76 30.52,35.14 U3.PAD | C17.2 32.15,34.34 30.9,34.34 | C18.2 4.5,17.65 C21.2 4,14.01 4.7,13.31 R6.1 6.25,10.45 P1.1 | 94.28,34.98 95.5,35.7 95.5,47.5 94.5,48.5 | 94,34.98 93.98,33.49 93.48,33 90.71,33 90,33.71 90,36.88 87.5,39.38 | 90.6,49.5 90.6,46.5 90.15,46 89,46 | P1.4B 4.4,2.5 4.4,4.3 11.65,4.3 P1.4A | C19.2 16.5,17.65 C20.2 v16.5,15.5 16.5,13.15 16,13.15 | R5.1 16,13.15 | C9.- 30.43,42.44 C16.2 31.76,42.44 v32.8,41.4 | L3.2 45.7,14.5 45.7,13.4 44.5,13.4 38.5,13.4 USB2.USB2-4 | SW1.3 19.5,11.6 17.9,13.2 16,13.2 16,13.15 | v95,55 94.36,54 94.36,49.46
  Top 1.422: 42.7,29.33 42.7,28.18 43.2,27.68 44.8,27.68 | 44.8,27.68 46.49,27.68 47.2,28.39 | U1.11 48.7,29.82 48.38,29.5 | 48.38,29.5 47.76,28.88 | 48.38,29.18 48.38,29.5 | P2.1A v84.5,7.5 P2.1B 85.92,12.42 85.92,17.9 85.92,19.17 87.07,20.32 88.41,20.32 C13.2 | R1.1 48.2,27.18 48.2,23.91 51.12,21 R25.1 | v20.2,34.4 24.4,34.4 R10.1 | 30.38,26.98 31.2,26.98 v31.2,25.6 | R11.2 3.8,32.94 1.4,35.34 1.4,52.35 3.15,54.1 5,54.1 v5,55 | 44.8,27.68 v44.8,27.7 | v49.3,44 48.8,43.5 C1.2
  Bottom 0.254: 52.46,47.23 53.4,47.23
  Bottom 0.305: U4.2 66.2,1.31 66.91,0.6 68.54,0.6 69.3,1.36 69.3,8.4 | 53.4,47.23 v53.4,52.1 | 40.6,47.23 v40.6,52.2 | v62.1,26.4 59.4,26.4 v59.4,26.3
  Bottom 0.406: v67.4,48.2 67.3,48.2 v63.9,44.8 | U3.P$2 28.8,35.54 28.8,35.5 28.7,35.5 28.7,34.7 27.7,34.7 27.7,35.5
  Bottom 0.61: 63.8,7.01 63.8,7.95 64.25,8.4 | 64.25,8.4 69.3,8.4 83.6,8.4 v84.5,7.5 | 47.5,5 50.5,8 59.7,8 60.1,8.4 64.25,8.4 | SW1.2 26.5,2.5 SW1.4 | v86.5,33.6 86.5,41.4 | 86.5,41.4 v86.5,41.5 v86.5,44 | 86.5,41.4 86.6,41.4
  Bottom 0.813: v64.8,6.5 64.31,6.5 63.8,7.01
  Bottom 1.27: J4.2 25.4,47.5 26.34,47.5 29.84,44 32.77,44 | 32.77,44 32.77,47.23 J3.2 | v32.8,41.4 32.77,41.4 32.77,44 | USB2.USB2-4 USB2.USB1-4 38.5,24.54 40.06,26.1 43.22,26.1 44.8,27.68 | SW2.3 79.9,5 | 79.9,5 SW2.4 83.48,5 84.5,6.02 v84.5,7.5 | SW1.3 SW1.4 47.5,5 | 53.6,46.19 v53.6,44.7 | SW2.2 79.9,2.5 79.9,5
  Bottom 1.422: 44.8,27.68 v44.8,27.7 | v20.2,34.4 19.1,33.3 19.1,31.55 17.75,30.2 9.37,30.2 7.77,28.6 J2.2 | v16.5,15.5 19.33,15.5 29.43,25.6 v31.2,25.6 | 25.4,47.5 25.4,49.86 23.76,51.5 7.5,51.5 v5,55 | 32.77,47.23 40.6,47.23 49.3,47.23 | 49.3,47.23 52.46,47.23 53.6,46.19 | 49.3,47.23 v49.3,44
  other vias: 78.4,24.5 79.2,24.5 77.6,24.5 79.2,27.2 78.4,27.2 77.6,27.2 17.1,11.4 17.9,11.4 18.7,11.4 40.5,5.3 40.5,4.5 40.5,3.7 9,47.7 9,46.9 9,46.1 16.1,45.2 16.9,45.2 28.2,57.1 27.4,57.1 26.6,57.1 23.4,57.1 22.6,57.1 21.8,57.1 92,32 92.8,32 93.6,32 98.4,34.3 98.4,35.1 98.4,35.9 64.8,30.2 65.4,28.8 65.4,29.6 49.4,52.6 48.6,52.6 47.8,52.6 7.2,30.9 8.8,30.9 8,30.9 73.7,13.1 74.5,13.1 71.6,19.1 71.6,18.3 85.5,18.2 85.5,17.4 71.3,7.1 24,11.4 24.8,11.4 29.7,19.5 28.9,19.5 35.1,26.6 35.1,25.8 40.7,28.7 40.7,27.9
  pour Top: 48.3,33.68 48.14,33.68 48.14,38.96 50.38,38.96 50.38,33.84 49.42,32.72 48.3,32.72
  pour Top (isolate 0.406): 0.1,0 0.1,60 34.2,60 34.2,0
  pour Bottom (isolate 0.406): -0.1,60 35.1,60 35.1,31.5 44.5,31.5 44.5,29.31 42.49,27.2 39.05,27.2 35.19,23.15 35.1,0 0,0
  pour Top (isolate 0.406): 34.3,0 34.3,28.64 35.06,29.4 40.46,29.4 41,28.86 41,26.1 57.6,26.1 57.6,40.4 53,40.4 53,50.3 34.3,50.3 34.3,60 100.1,60 100.1,31.4 85.5,31.4 85.5,15.5 89.42,15.5 90.5,14.42 90.5,4.8 91.78,4.8 93,3.58 93,0
  pour Bottom (isolate 0.406): 100,0 34.5,0 34.5,29.4 39.07,29.4 39.8,28.67 39.8,27.4 39.37,27.4 37.4,25.43 37.4,12 39.8,12 39.8,23.51 40.79,24.5 44.4,24.5 46.1,26.2 57.5,26.2 57.5,39.3 50.8,39.3 50.8,49.1 34.5,48.9 34.5,60 100,60
GNDA
  Top 0.305: U2.6 11.8,35.15 11.8,35.24 11.55,35.24 U2.11 11.55,34.24 TP3.TP | C11.2 11.55,39.49 11.55,39.14
  Top 1.016: J1.2 4.47,48.01 3.2,46.74 3.2,40.29 4.95,38.54 R11.1
  Top 1.27: JP1.1 11.8,40.65 10.95,39.79 | 10.95,39.79 10.59,39.74 7.5,39.74 R11.1 | U2.11 11.55,39.14 11.25,39.79 11.35,39.79 10.95,39.79
LED_DIM  (via drill 0.4 pad 0.61)
  Top 0.254: R24.2 v74.9,29.4 | v70.2,25.2 68.41,25.2 67.63,25.98 U12.43
  Top 0.305: U6.5 89.46,25.76 v89.6,25.9
  Bottom 0.254: v89.6,25.9 75.35,25.9 74.9,26.35 v74.9,29.4 74.9,29.9 74.4,30.4 71.77,30.4 70.2,28.83 v70.2,25.2
MCU_USB_DN
  Top 0.305: R23.2 61.6,10.08 62.52,11 67.25,11 68.13,11.88 U12.19
MCU_USB_DP
  Top 0.305: R22.2 63.7,9.92 64.28,10.5 67.54,10.5 68.63,11.59 U12.20
N$1
  Top 0.254: U1.1 46.3,32.27 46.3,32.28
  Top 0.813: 46.3,32.28 45.6,32.28 44.4,33.48 L1.P$2
  pour Top: 41.58,33.42 41.58,46.8 46.19,46.8 47.34,45.65 47.34,32.4 42.44,32.4
N$2
  Top 0.254: 13.11,37.24 U2.10
  Top 0.305: C11.1 17.05,39.49 17.05,38.84 16.7,38.49 16.38,38.49 15.95,38.06 R12.1
  Top 0.406: R12.1 13.11,37.24
N$3  (via drill 0.4 pad 0.61)
  Top 0.254: U3.P8 28.29,36.73 v28.29,38.18 | R10.2 24.46,36.29 v24.46,37.54
  Bottom 0.305: v24.46,37.54 27.65,37.54 v28.29,38.18
N$4
  Top 1.27: USB2.USB2-1 USB2.USB1-1
  Top 1.422: USB2.USB2-1 24.76,13.38 L2.1
N$5
  Top 0.254: U3.P4 28.7,32.59 C10.1
N$6
  Top 1.27: L3.1 41.57,17.5 USB2.P$2 | USB2.P$4 USB2.P$3
  Bottom 1.27: USB2.P$2 USB2.P$4 | USB2.P$1 USB2.P$3
N$7
  Top 0.305: R8.1 LED1.A
N$8
  Top 0.254: 13.8,36.64 U2.9
  Top 0.305: 15.95,34.74 R13.1
  Top 0.406: 15.95,34.74 15.51,34.74 15.5,35.35 14.8,36.06 14.21,36.65 13.8,36.65 13.8,36.64
N$9
  Top 0.305: LED2.C R9.2
N$10  (via drill 0.4 pad 0.61)
  Top 0.2: U1.6 50.7,30.29 51,29.98 v53.1,29.98
  Top 0.254: R1.2 v51.82,27.18 51.82,27.12
  Bottom 0.406: v51.82,27.18 52.55,27.18 53.1,27.73 v53.1,29.98
N$11
  Top 0.254: 89.6,24.8 89,24.8 U6.4
  Top 0.813: D1.A 91.36,21.16 91.36,24 93.16,24 L4.1 90.34,24.06 89.6,24.8
N$12  (via drill 0.4 pad 0.41)
  Top 0.254: U3.P7 28.7,37.19 28.95,37.44 32.13,37.44 32.4,37.17 C17.1 | 46.5,22.3 46.75,22.3 51.5,17.55 v51.5,16.8 | LED2.A 69.16,0.85 68.6,1.41 68.6,2.5 68.1,3 58.65,3 58.2,3.45 58.2,8.18 56.48,9.9 53.8,9.9 v51.5,12.2
  Top 0.305: C17.1 32.89,36.29 34,35.18 34,24.61 36.31,22.3 46.5,22.3
  Bottom 0.254: v51.5,12.2 v51.5,16.8
N$13
  Top 0.254: U6.2 85.11,25.76 84.96,25.61
  Top 0.813: C5.1 84.96,25.61 84.96,25.6
N$14
  Top 0.254: U6.1 85.58,26.42 85.12,26.88
  Top 0.813: R3.2 85.12,26.91 85.12,26.88
N$15  (via drill 0.4 pad 0.81)
  Top 0.305: R7.2 8.08,25 8.5,24.58 v8.5,21.1 | v8.2,15.1 7.95,15.1 7.4,15.65 7.4,16.48 9.02,18 U7.4
  Bottom 0.305: v8.5,21.1 9.22,21.1 10,20.32 10,17 v8.2,15.1
N$16
  Top 0.254: C28.1 71.4,35.1 D2.C
N$17
  Top 0.254: U7.9 12.35,19.01 13.12,18.24 13.12,15.94 14.18,14.88 14.25,14.88 R5.2
N$18  (via drill 0.4 pad 0.61)
  Top 0.254: U7.2 8.3,19.01 | 8.3,19.01 8.3,19 | 8.3,19.01 7.84,19.01 v7.84,18.72 | R6.2 v6.24,16.16
  Bottom 0.254: v6.24,16.16 6.24,18.28 6.84,18.88 7.84,18.88 v7.84,18.72
N$19
  Top 0.305: R15.1 45.6,5.15 LED5.A
N$21
  Top 0.254: LED4.A 14.44,2.45 R4.1
N$22
  Top 0.254: LED3.A 17.22,2.45 R2.1
N$24
  Top 0.305: Q1.1 73.2,8.35 R20.1 R19.2
N$25
  Top 0.254: 88.5,41.96 88.11,42.35 U10.6
  Top 0.61: 88.5,41.96 88.5,40.6 89.63,39.47 Y2.2 C22.2
N$26
  Top 0.254: SW2.1 77.14,2.5 77.5,2.86 77.5,8.1 77.9,8.5 81.6,8.5 R27.1
N$27
  Top 0.305: Y1.3 61,41.7 | U12.7 61.83,22.55 60.9,23.48 60.9,32.3 62,33.4 62,41.06 61.46,41.6 60.9,41.6 Y1.3
  Top 1.016: C24.2 58.6,40.71 58.6,41.7 Y1.3
N$28
  Top 0.254: 63.6,38 63.6,37.99
  Top 0.305: U12.6 62.09,23.05 61.4,23.75 61.4,31.95 61.85,32.4 62.5,33.05 62.5,35.6 63.1,36.2 Y1.1
  Top 1.016: Y1.1 63.6,37.99 65,37.99 C25.2
N$29
  Top 0.254: LED6.C R28.2
N$30
  Top 0.254: U10.3 83.81,40.36 83,41.17 83,49.5 83.5,50 85.75,50 86.38,50.62 UART3.2
N$31
  Top 0.254: 88.5,43.5 88,43 85.06,43 U10.7
  Top 0.61: 88.5,43.5 89.29,44.29 Y2.1 92.61,44.29 C23.2
N$32  (via drill 0.4 pad 0.81)
  Top 0.254: U10.4 84,41.02 83.5,41.52 83.5,49 84,49.5 85,49.5 85.5,49 | v85,52 85.12,52 UART3.3
  Top 0.305: v85.5,48.95 85.5,49
  Bottom 0.254: v85.5,48.95 85.5,51.5 v85,52
N$33
  Top 0.406: U10.23 73.17,42.34 72.38,43.13 UART2.2
N$34
  Top 0.406: U10.24 72.82,41.68 71.12,43.38 UART2.3
N$35  (via drill 0.4 pad 0.81)
  Top 0.406: U10.17 v73.9,46.3 | v69.8,46.4 69.88,46.4 UART2.4
  Bottom 0.406: v69.8,46.4 73.9,46.4 v73.9,46.3
N$36  (via drill 0.4 pad 0.81)
  Top 0.406: U10.16 74.74,46.96 v73.9,47.8 | v68.6,49.8 68.62,49.8 UART2.5
  Bottom 0.406: v73.9,47.8 70.6,47.8 v68.6,49.8
N$37  (via drill 0.4 pad 0.81)
  Top 0.254: U10.2 83.78,39.7 82.5,40.98 82.5,50.4 82.85,50.75 v82.9,50.75
  Top 0.305: UART3.5 83,54 v83,52.5
  Bottom 0.254: v82.9,50.75 83,50.75
  Bottom 0.305: 83,50.75 v83,52.5
N$38
  Top 0.254: U10.1 83.78,39.04 82,40.82 82,51 82.5,51.5
  Top 0.305: 82.5,51.5 83.25,51.5 83.88,52.12 UART3.4
N$39
  Top 0.305: 58.2,54 58.2,50.02 58.62,49.5 60.49,49.5 61.2,50.11 61.2,52.6 61.9,53.3 63.73,53.3 64.5,52.53 64.5,49.4 67.4,46.6 68.6,45.4 70.38,45.4 70.6,45.18 70.6,42.5 73,40.3 73,25.94 72.61,25.55 U12.36
  Top 0.406: UART1.2 58.2,54
N$40
  Top 0.305: 57.3,54 57.3,50.17 58.27,49 60.81,49 61.7,49.89 61.7,52.38 62.12,52.8 63.55,52.8 64,52.35 64,49.2 68.4,44.9 69.86,44.9 70.1,44.66 70.1,42.23 72.5,40.03 72.5,27.62 71.78,26.9 U12.37
  Top 0.406: UART1.3 57.3,54
N$41  (via drill 0.5 pad 0.3)
  Top 0.305: 55.9,54 55.9,50.2 55.9,49.33 59,46.23 v59.2,45.9 | U12.45 66.65,26.95 66.65,30.19 65.64,31.2 v63.2,31.2
  Top 0.406: UART1.4 55.9,54
  Bottom 0.305: v59.2,45.9 59.2,32.05 60.05,31.2 v63.2,31.2
N$42  (via drill 0.5 pad 0.3)
  Top 0.254: U12.23 70.2,18.7 v70.2,20.5
  Top 0.305: 54.7,54 54.7,48.9 v57.7,45.9
  Top 0.406: UART1.5 54.7,54
  Bottom 0.305: v57.7,45.9 58.6,45 58.6,25.27 59.27,24.6 69.56,24.6 70.2,23.96 v70.2,20.5
N$44  (via drill 0.4 pad 0.61)
  Top 0.254: U8.2 69.5,40.95 69.5,41.5 69.1,41.9 69.1,42.3 v68.8,42.6
  Bottom 0.254: Y3.X1 68.1,44.1 68.1,43.3 v68.8,42.6
N$45
  Top 0.305: R21.2 69.3,9.05 Q1.3
N$46  (via drill 0.4 pad 0.61)
  Top 0.254: U8.1 70.1,40.95 70.1,41.6 69.6,42.1 69.6,43.9 v69.3,44.2
  Bottom 0.254: Y3.X2 69.4,44.1 v69.3,44.2
N$48  (via drill 0.4)
  Top 0.254: U12.3 62.83,24.55 62.4,24.98 62.4,25.7 62.8,26.2 v62.8,27.1 63,27.3 63.8,27.3 R29.1 | !RESET!.TP v59.4,27.3
  Bottom 0.254: v62.8,27.1 59.7,27.1 v59.4,27.3
N$52
  Top 0.254: U9.2 78.5,32.81 C29.1
PV_CHG  (via drill 0.4 pad 0.61)
  Top 0.254: U7.8 12.22,18.5 12.64,18.08 12.64,9.49 13.34,8.8 14.24,7.89 v14.24,6.72 | LED3.C v16,0.95 v16,0.96
  Bottom 0.254: v16,0.96 14.69,0.96 14.24,1.41 v14.24,6.72
PV_PG
  Top 0.254: U7.6 11.52,16 11.04,15.52 11.04,10.42 11.02,10.42 11.52,9.89 13.6,7.81 13.6,1.18 13.83,0.95 LED4.C
PVCHG_TS  (via drill 0.4 pad 0.81)
  Top 0.305: 5.23,25 5.2,25 5.2,23.95 5.65,23.5 6.76,23.5 7.3,22.96 v7.3,21.1 | U7.5 9.1,17.12 9.1,16.52 8.78,16.2 v8.2,16.2
  Top 1.27: R7.1 5.23,25 J2.1
  Bottom 0.305: v8.2,16.2 8.2,17.3 8.9,18 8.9,19.4 8.4,19.9 7.7,19.9 7.3,20.3 v7.3,21.1
RTC_ALARM  (via drill 0.4 pad 0.61)
  Top 0.254: U8.11 69.6,38.05 69.6,37.14 69.06,36.6 67.06,36.6 66.7,36.24 66.7,35.1 v66.5,34.9 | U12.40 69.1,26.9 v69.1,30.9
  Bottom 0.254: v66.5,34.9 66.5,31.81 67.41,30.9 v69.1,30.9
SCL  (via drill 0.4 pad 0.3, 0.4 pad 0.61, 0.5 pad 1.02)
  Top 0.254: U2.3 9.55,36.14 8.55,37.14 v8.3,37.14 | 84.5,47 84.5,46.96 U10.13 89.15,46.96 89.6,47.41 v89.6,50.8 | v66.4,16.1 66.4,16.53 66.13,16.8 U12.15 | v57.9,17.5 59.4,17.5 R16.1 | I2C.2 43.2,54 v43.2,56.1 | U8.10 69.1,38.05 69.1,37.28 68.82,37.1 66.87,37.1 66.2,36.43 65.7,35.9 65.7,35.32 65.38,35 v65,35 | v59.9,35 v57.9,35 | U9.4 79.41,31.79 v79.3,31.9
  Top 0.305: U11.6 82.01,16.86 82.7,16.17 82.7,14.52 81.98,13.8 73.33,13.8 72,15.13 v72,16.4
  Bottom 0.254: 57.9,17.1 57.9,16.81 58.61,16.1 v66.4,16.1 | v89.6,50.8 89.6,53.88 88.28,55.2 70.7,55.2 69.4,56.5 | 56.1,56.5 55.1,55.5 55.1,41.4 | 43.6,56.5 v43.2,56.1 | v59.9,35 v65,35 65.3,35 65.85,35.55 67.1,35.55 67.7,35 79.02,35 79.3,34.72 v79.3,31.9
  Bottom 0.305: v8.3,37.14 8.76,37.14 9.5,36.4 13.51,36.4 14.9,35.01 14.9,32.56 15.26,32.2 16.08,32.2 16.5,32.62 16.5,35.1 17.8,36.4 22.23,36.4 22.9,37.07 22.9,38.5 23.9,39.5 32.57,39.5 33.7,38.37 33.7,37.12 34.42,36.4 39.3,36.4 44.3,41.4 55.1,41.4 55.84,41.4 57.9,39.34 v57.9,35 v57.9,17.5 57.9,17.1 | 69.4,56.5 56.1,56.5 43.6,56.5 | v72,16.4 66.7,16.4 v66.4,16.1
SDA  (via drill 0.4 pad 0.3, 0.4 pad 0.61, 0.5 pad 1.02)
  Top 0.254: U2.4 8.41,35.63 8.3,35.74 | U10.14 84.5,47.62 84.5,47.6 88.5,47.6 88.8,47.9 v88.8,51.9 | v67.1,15.4 67.1,16.73 66.63,17.2 U12.16 | R17.1 62.51,17.55 63,17.06 v63,15.4 | v55.9,42.1 55.9,41 55.6,40.7 v54,40.7 | v55.9,46.5 51.4,51 42.8,51 41.88,51.93 I2C.3 | U8.9 68.5,38.05 68.5,37.6 66.61,37.6 65.55,36.54 v65,36 | v59.9,36 59.1,36 v57.2,37.8 | U9.6 81,30.61 v81,30
  Top 0.305: 8.3,35.74 v8.3,35.84 | U11.5 81.2,15.6 81.2,15.32 80.28,14.4 73.8,14.4 v72.7,15.5
  Bottom 0.254: 57.2,16.9 57.2,16.48 58.28,15.4 v63,15.4 v67.1,15.4 | v88.8,51.9 88.8,53.41 87.81,54.4 69.8,54.4 68.6,55.6 56.54,55.6 55.9,54.96 v55.9,46.5 v55.9,42.1 | v59.9,36 v65,36 67.3,36 67.7,35.6 79.03,35.6 81,33.63 v81,30
  Bottom 0.305: v8.3,35.84 13.2,35.84 14.4,34.64 14.4,32.24 14.94,31.7 16.42,31.7 17,32.28 17,34.72 18.08,35.8 22.62,35.8 23.65,36.83 23.65,38.23 24.32,38.9 32.05,38.9 32.9,38.05 32.9,36.85 34.01,35.74 39.64,35.74 44.6,40.7 v54,40.7 55.44,40.7 57.2,38.94 v57.2,37.8 57.2,16.9 | v72.7,15.5 67.1,15.5 v67.1,15.4
SW1  (via drill 0.5 pad 0.3)
  Top 0.254: v48.5,1 48.5,9.98 49.72,11.2 v50,11.2 50,12.79 49.24,13.55 R26.1
  Top 0.305: SW1.1 22.3,2.5 23.8,1 v37.4,1 | U12.12 64.3,20.05 v64.3,13.5
  Bottom 0.254: v64.3,13.5 60.8,13.5 60.6,13.7 54.9,13.7 52.4,11.2 v50,11.2 | v37.4,1 v48.5,1
SWCLK
  Top 0.254: U12.29 73.9,22.05 74.15,21.8 77.5,21.8 SWCLK.TP
SWDIO
  Top 0.254: U12.39 69.6,26.9 69.6,28.08 70.02,28.5 70.84,28.5 71.2,28.86 SWDIO.TP
USB_CONNECT
  Top 0.305: R19.1 75.3,10.58 74.18,11.7 70.41,11.7 69.63,12.48 U12.22
USB_DM  (via drill 0.4 pad 0.41)
  Top 0.305: USB0.P2 62.5,4.28 62.5,6.1 v62.2,6.4 61.6,7 R23.1
  Bottom 0.254: U4.6 67.2,4.37 67.2,5.18 66.78,5.6 62.48,5.6 62.2,5.88 v62.2,6.4
USB_DP  (via drill 0.4 pad 0.41)
  Top 0.254: R21.1 65.6,7.35 v65.6,7.5
  Top 0.305: USB0.P3 63.2,6.1 63.7,6.6 R22.1 67.5,7.45 R21.1
  Bottom 0.254: U4.1 67.22,1.83 67.7,2.31 67.7,5.34 66.94,6.1 66.24,6.1 65.6,6.74 v65.6,7.5
USB_FAULT  (via drill 0.4 pad 0.61)
  Top 0.2: U1.8 51.55,31.28 v51.7,31.13
  Top 0.305: LED5.C 46.44,1.05 47.2,1.81 47.2,10.8 v48.7,12.3
  Bottom 0.305: v48.7,12.3 48.7,30.73 49.27,31.3 51.53,31.3 v51.7,31.13
USRLED
  Top 0.254: LED6.A 72.04,0.85 72.5,1.31 72.5,6.61 72.99,7.1 75.78,7.1 76.5,7.82 76.5,11.32 75.72,12.3 71.52,12.3 70.63,13.29 U12.24
VBAT  (via drill 0.4 pad 0.61, 0.5 pad 0.3)
  Top 0.254: U1.3 46.3,31.28 | U3.P9 27.7,37.34 27.22,37.82 v27.22,38.23 | U3.P10 26.38,36.64 26.38,36.58 | U7.10 12.32,19.49 12.96,19.52 | U6.6 88.96,26.42 88.96,27.36
  Top 0.305: v25.1,38.2 23.64,38.2 23.45,38.39 22.79,39 21.8,39.94
  Top 0.61: 46.3,31.28 44.7,31.28 44.7,31.18 C4.1 | L1.P$1 38.7,40.18 | 42.45,31.18 C3.2 | U5.1 U5.5 | C14.1 89,32.2 88.1,33.1 88.1,35.45 87.25,36.3 85.11,36.3 80.9,40.51 80.9,48.1 v77.3,51.7 | v62.7,50.7 62.7,45.72 61.78,44.8 56.16,44.8 51.36,49.6 39,49.6 35.7,52.9 24.37,52.9 22.73,51.26 J4.1
  Top 0.813: L4.2 93.12,27.51 93.12,28.64 89.01,28.64 | 89.01,28.64 C12.1 C14.1 | 89.01,28.64 88.96,28.64 88.96,27.36
  Top 1.016: C16.1 27.05,39.94 C9.+ 26.06,39.94 26.06,36.58 26.38,36.58 | 12.96,19.52 14.25,19.52 C19.1 | 16,19.35 C20.1 | U5.5 14.9,28.34 14.9,30.1
  Top 1.27: 13.8,42.24 14.4,42.24 | 44.7,31.18 42.45,31.18 39.82,31.18 38.7,32.3 38.7,40.18 | C6.1 14.9,30.1 17.65,30.1
  Top 1.422: JP1.2 13.8,47.5 | 13.8,47.5 13.8,42.34 13.8,42.24 | 21.3,37.24 R12.2 R13.2 | 21.3,39.7 21.3,39.94 21.8,39.94 C9.+ 24.8,39.94 24.8,43.21 25.79,44.2 38,44.2 L1.P$1 | J4.1 13.8,47.5
  Top 1.676: C19.1 16,19.35 | C20.1 17.65,20.52 17.65,30.1 R13.2
  Top 2.54: 14.4,42.24 20.18,42.24 21.3,41.12 21.3,39.7 21.3,37.24
  Bottom 0.305: v27.22,38.23 25.1,38.23 v25.1,38.2
  Bottom 0.61: v77.3,51.7 67.7,51.7 66.7,50.7 v62.7,50.7
  pour Top: 40.46,46.8 40.46,33.1 41.48,31.76 42.54,31.76 42.54,30.32 36.24,30.32 35.02,31.54 35.02,45.73 36.09,46.8
VPROG
  Top 0.305: U2.7 13.66,35.63 14,35.3 TP1.TP

## Text on the board
Top: TOP
Bottom: BOT
tNames: + | + | BATT | BATT IN | 5V AUX | 05/2012 | <ca508@ic.ac.uk> | e.quinox | Imperial College London | PV CHARGE | SW1 | SW2 | Fusion: 51654 | 5V-20V | USB PWR | CC DRV | EE4 FYP : Charith Amarasinghe | Mini Revision: A0
bNames: Fusion: 51654
tStop: TMSK
bStop: BMSK